# Altium PCB 175-00061, rev1, PCB, NRES Crate Slot MotherBoard.PcbDoc (part 1 of 2)
Units mm, origin at the board's own origin, x right, y up, seen from the top; angles counter-clockwise.
Board outline 222 x 100 mm, 6 copper layers (Top Layer (*.GTL), MidLayer1 (*G1), InternalPlane1 (*.GP1), InternalPlane2 (*.GP2), InternalPlane3 (*.GP3), Bottom Layer (*GBL)); 58 components, 62 nets, 611 pads, 118 vias.
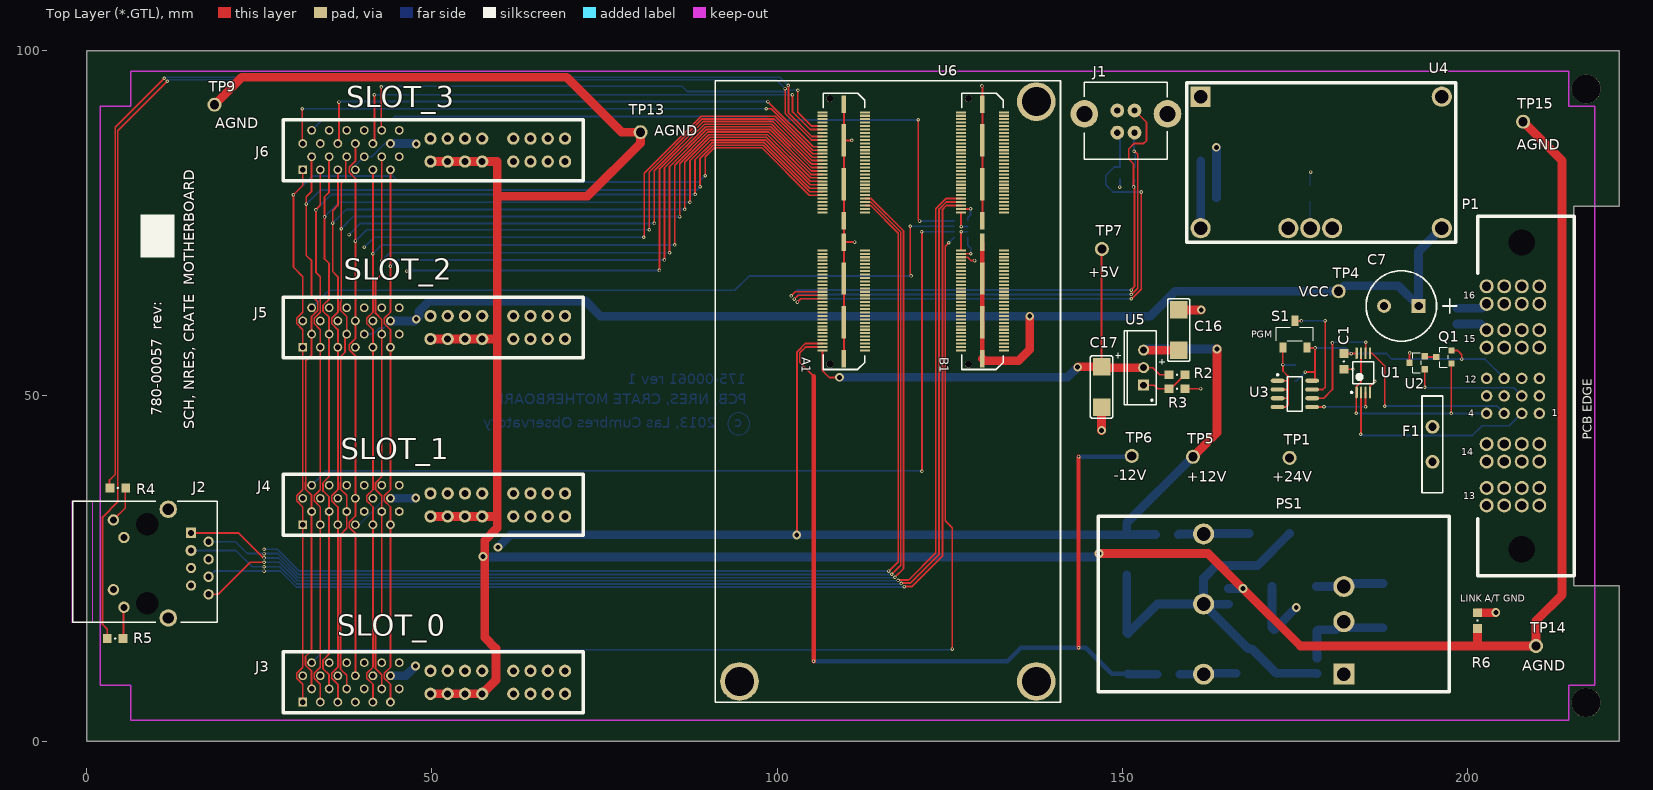
[diagram p0: Top Layer (*.GTL) view]
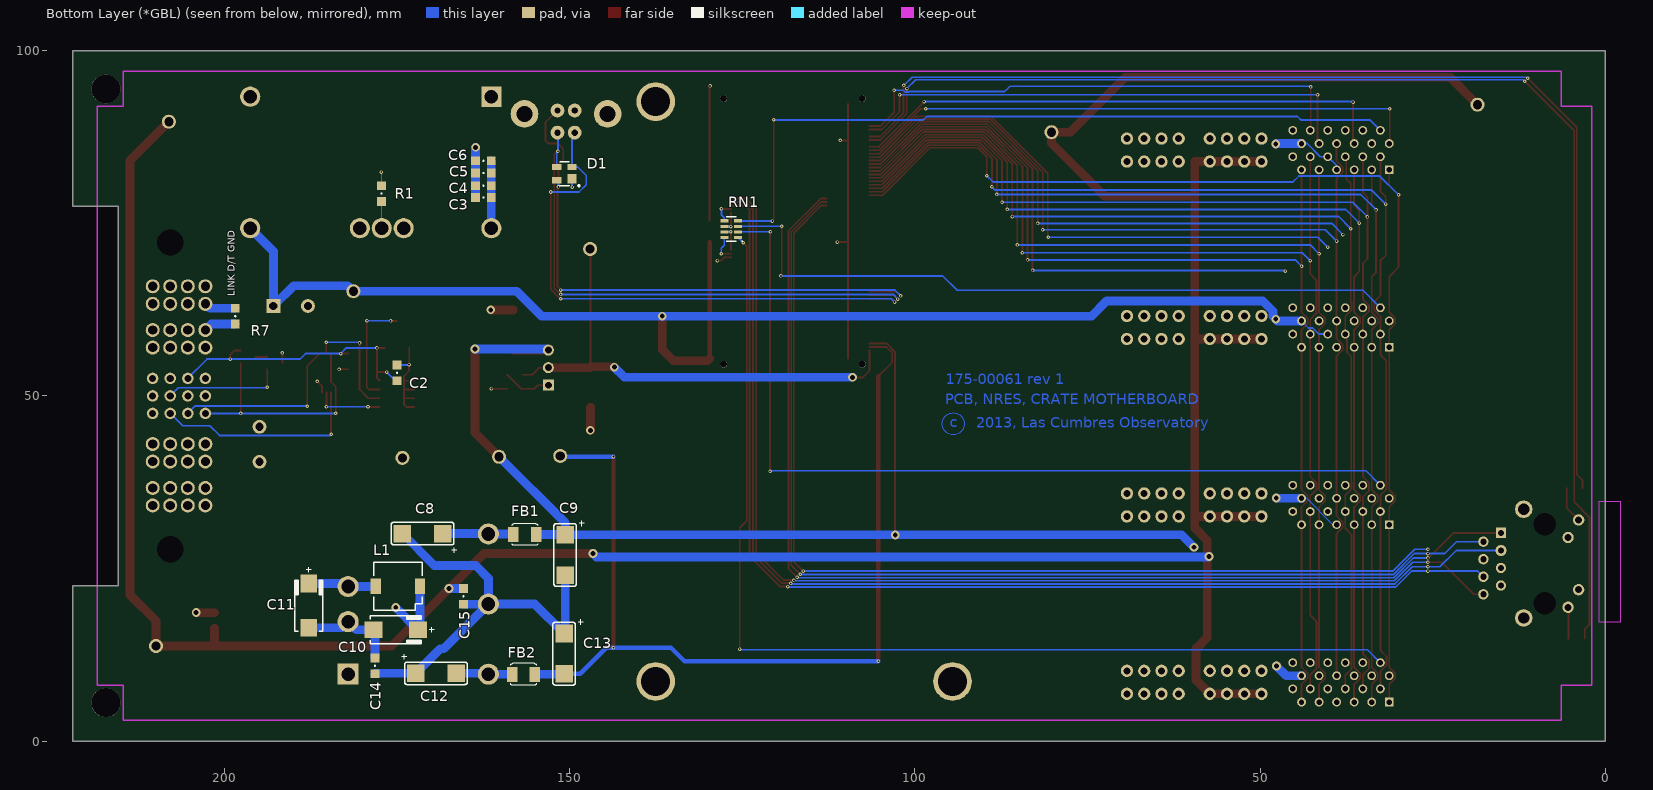
[diagram p1: Bottom Layer (*GBL) view, seen from below]
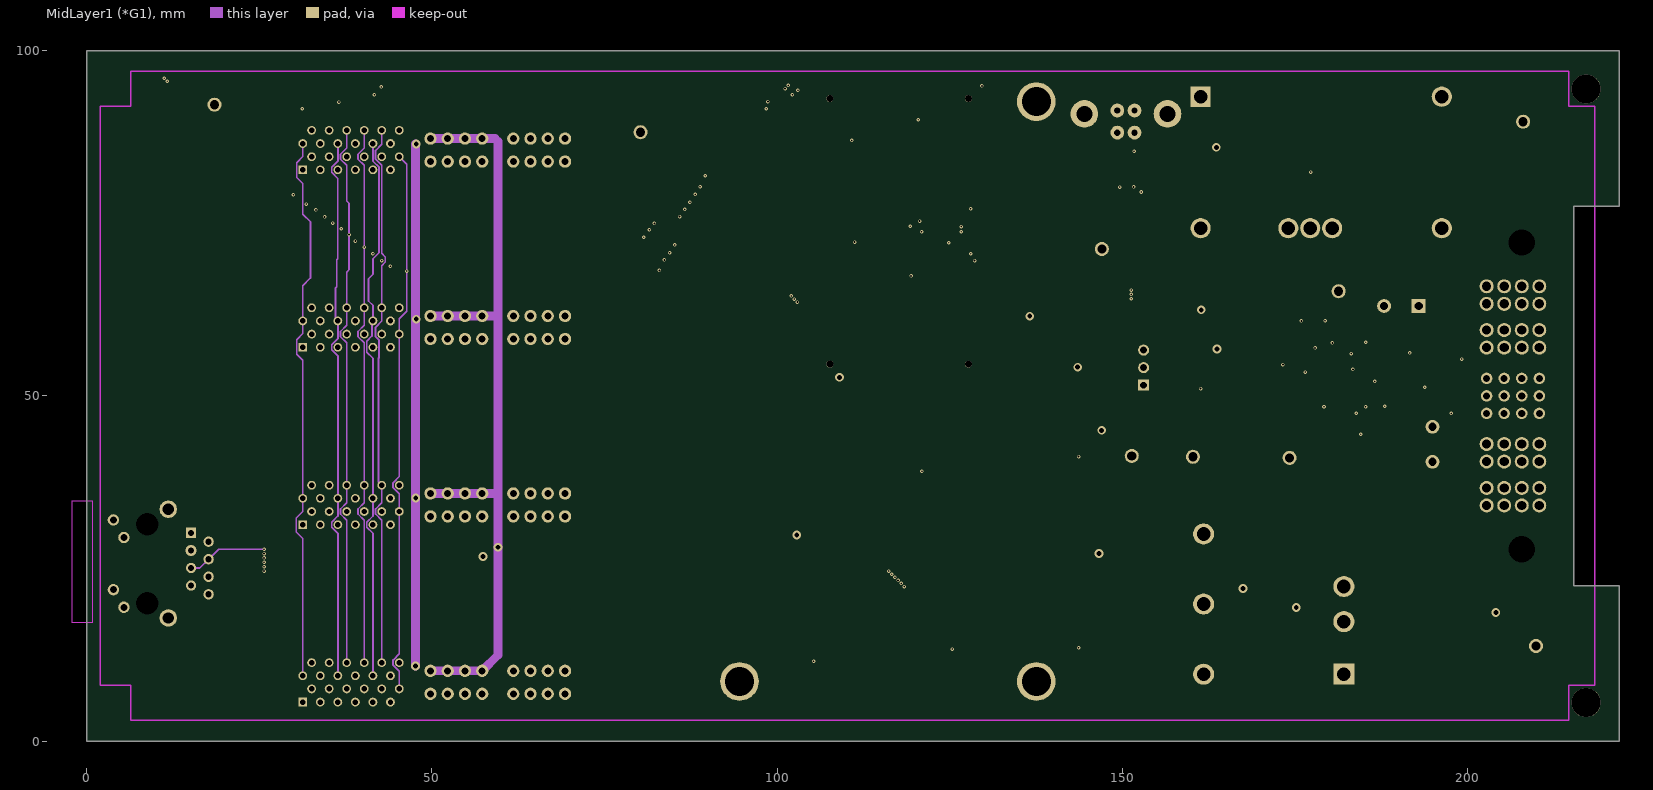
[diagram p2: MidLayer1 (*G1)]
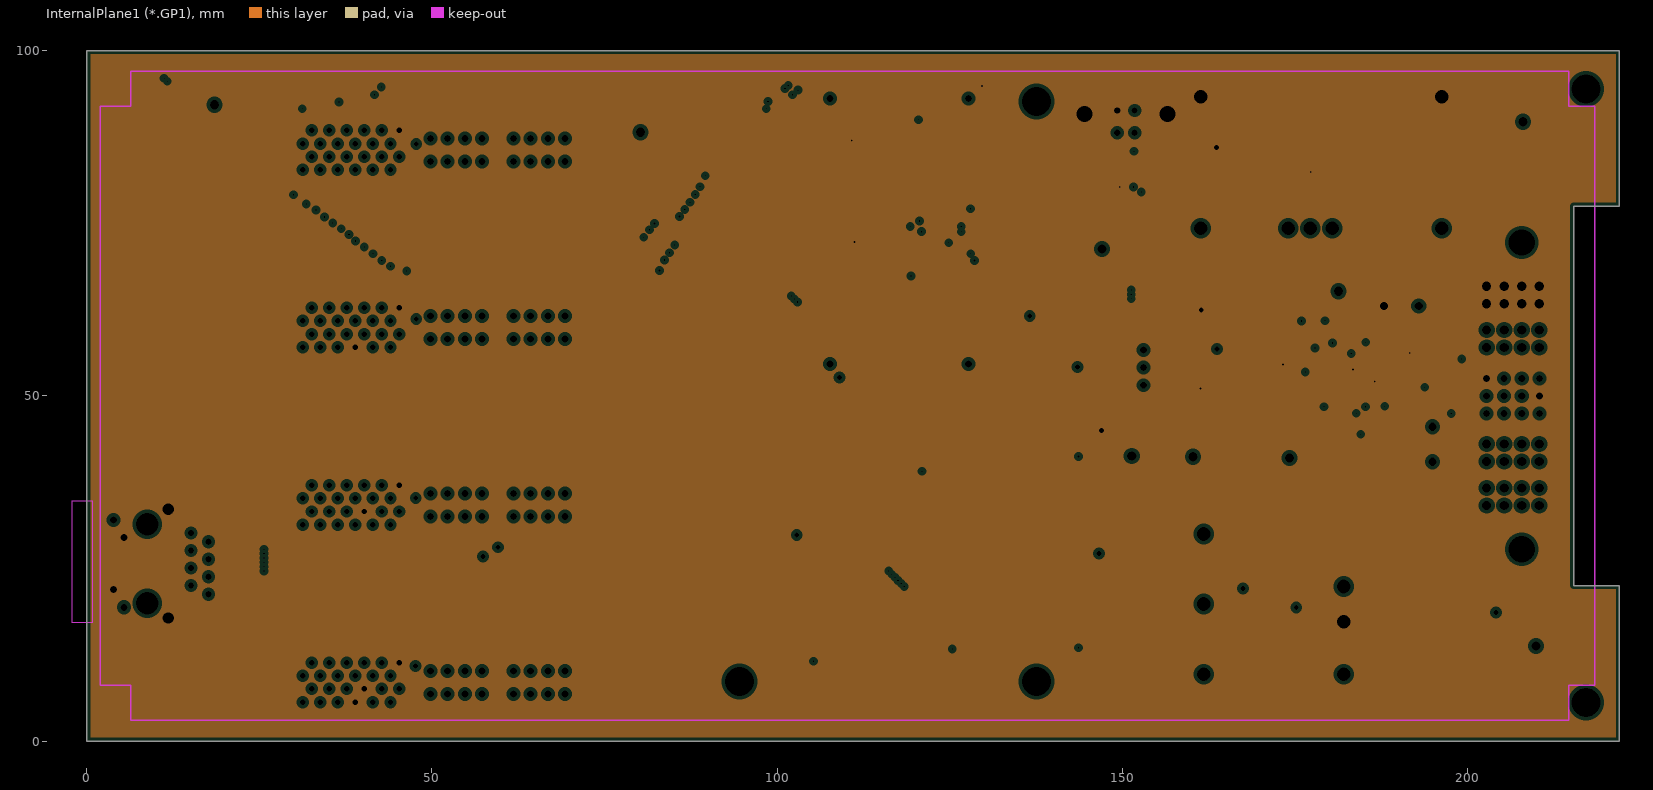
[diagram p3: InternalPlane1 (*.GP1), clearances drawn from the general rule]
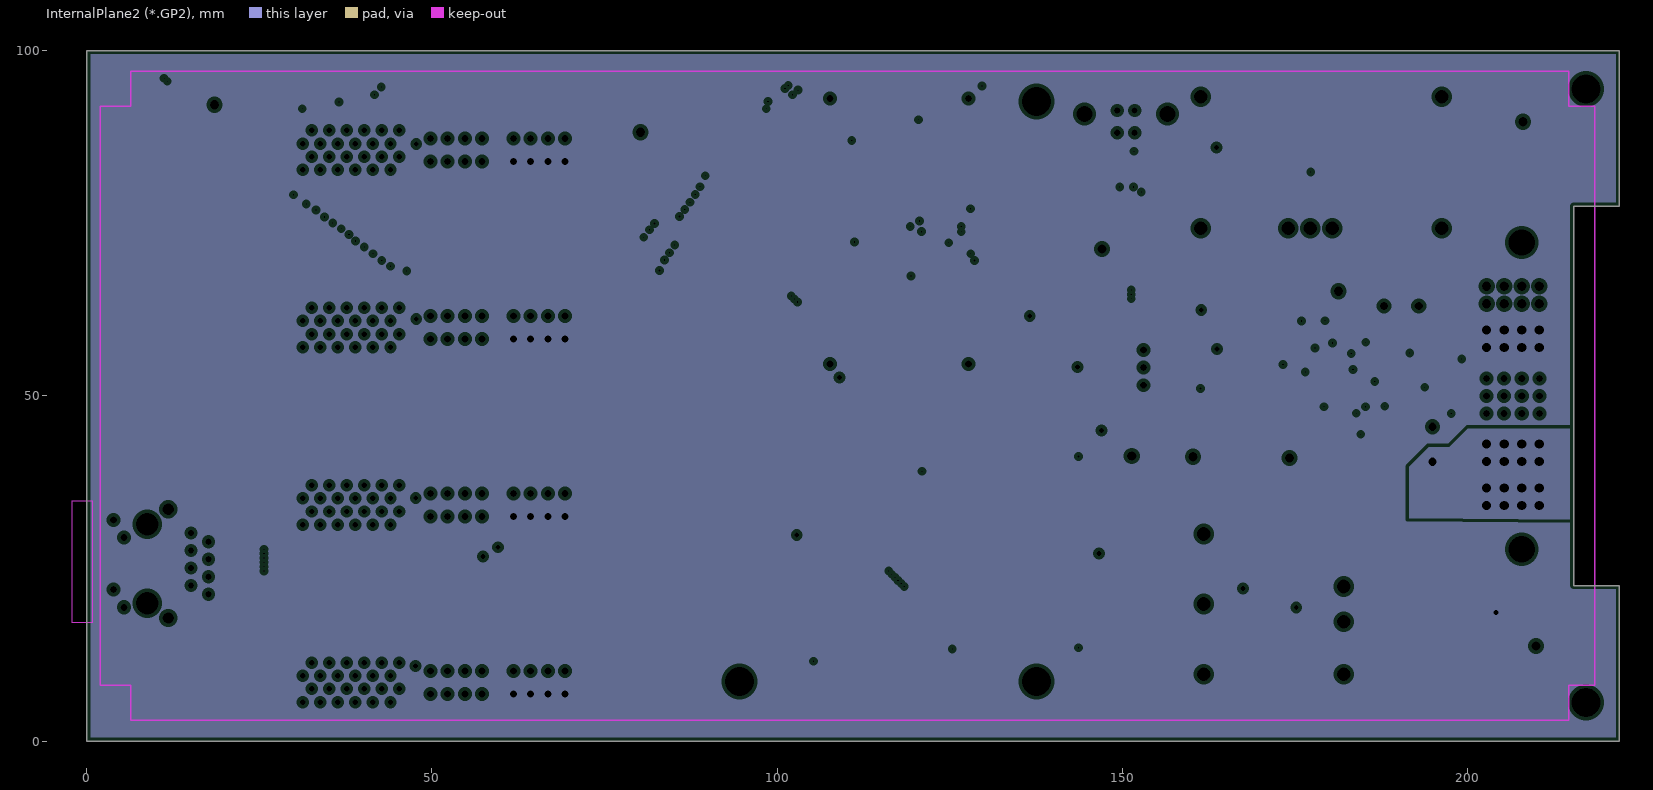
[diagram p4: InternalPlane2 (*.GP2), clearances drawn from the general rule]
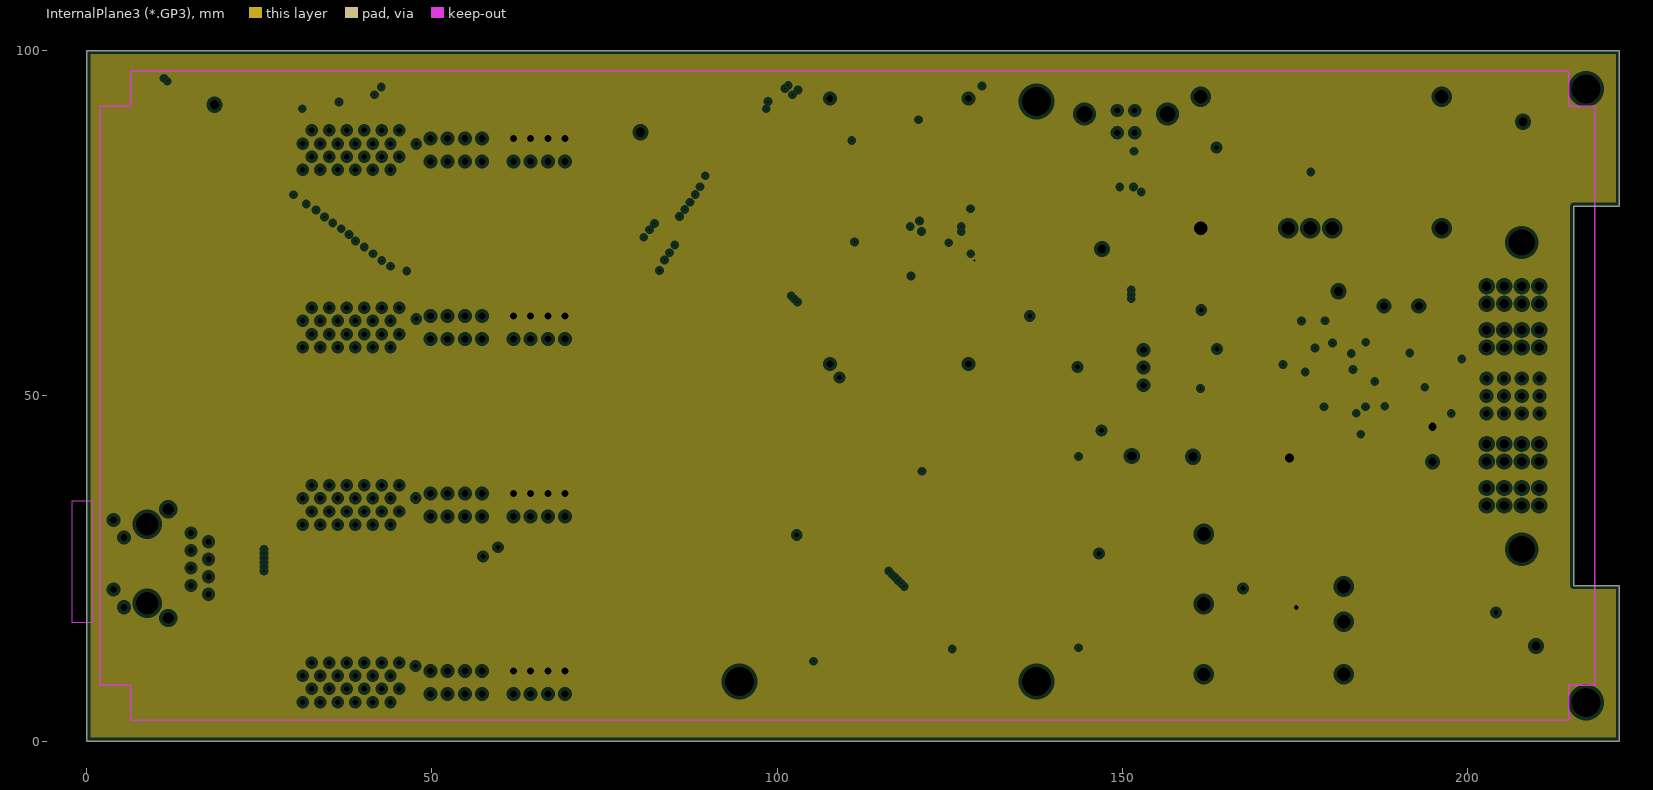
[diagram p5: InternalPlane3 (*.GP3), clearances drawn from the general rule]

## Layer stack, top to bottom
Top Layer (*.GTL): signal copper 0.0356
Dielectric: core 0.32, FR-4, Dk 4.8
MidLayer1 (*G1): signal copper 0.0356
Dielectric: prepreg 0.32, FR-4, Dk 4.8
InternalPlane1 (*.GP1): plane copper 0.0356, net D
Dielectric: core 0.32, FR-4, Dk 4.8
InternalPlane2 (*.GP2): plane copper 0.0356, net (Multiple Nets)
Dielectric: prepreg 0.32, FR-4, Dk 4.8
InternalPlane3 (*.GP3): plane copper 0.0356, net +24V
Dielectric: core 0.32, FR-4, Dk 4.8
Bottom Layer (*GBL): signal copper 0.0356

## Board outline
0,0 0,100 222,100 222,77.5 215.4,77.5 215.4,22.5 222,22.5 222,0

## Design rules (kind name [scope] priority, off if disabled: settings)
Clearance [All] p1: gap=0.127
HoleSize [All] p1: absolutevalues=TRUE maxlimit=7.62 minlimit=0.025 maxpercent=80.000 minpercent=20.000
MinimumSolderMaskSliver [All] p1: minsoldermaskwidth=0.051
PlaneClearance [All] p1: clearance=0.508
PlaneConnect [All] p1: planeconnectstyle=Relief reliefexpansion=0.508 reliefentries=4 reliefconductorwidth=0.254 reliefairgap=0.254
PolygonConnect [All] p1: connectstyle=Relief reliefconductorwidth=0.254 reliefentries=4 polygonreliefangle="90 Angle"
RoomDefinition "780-00057, rev1, Pg2, SCH, NRES, Crate Slot MotherBoard" [InComponentClass('780-00057, rev1, Pg2, SCH, NRES, Crate Slot MotherBoard')] p1: confinementstyle=ConfineIn formatcopy=TRUE lockcomponents=FALSE outline -2.461,3.547 162.639,3.547 162.639,96.13 -2.461,96.13
RoomDefinition "780-00057, rev1, Pg1, SCH, NRES, Crate Slot MotherBoard" [InComponentClass('780-00057, rev1, Pg1, SCH, NRES, Crate Slot MotherBoard')] p2: confinementstyle=ConfineIn formatcopy=TRUE lockcomponents=FALSE outline -41.59,-72.285 303.215,-72.285 303.215,125.073 -41.59,125.073
RoutingVias [All] p1: holewidth=0.254 width=0.508 viastyle="Through Hole" minholewidth=0.254 minwidth=0.508 maxholewidth=0.711 maxwidth=1.27
SilkToSilkClearance [All] p1: silktosilkclearance=0.051
SilkscreenOverComponentPads [All] p1: minsilkscreentomaskgap=0.051
SolderMaskExpansion [All] p1: expansion=0.102
Width [All] p1: maxlimit=1.27 minlimit=0.127 preferedwidth=0.254 minimp=50.000000 maximp=50.000000 favimp=50.000000
22 further rules are at their usual default settings.

## Classes and differential pairs
component class "780-00057, rev1, Pg2, SCH, NRES, Crate Slot MotherBoard": D1 J1 J2 J3 J4 J5 J6 R4 R5 RN1 U6
component class "780-00057, rev1, Pg1, SCH, NRES, Crate Slot MotherBoard": C1 C2 C3 C4 C5 C6 C7 C8 C9 C10 C11 C12 C13 C14 C15 C16 C17 F1 FB1 FB2 L1 P1 PS1 Q1 R1 R2 R3 R6 R7 S1 TP1 TP4 TP5 TP6 TP7 TP9 TP13 TP14 TP15 U1 U2 U3 U4 U5

## Components (designator, comment, footprint, x,y, rotation, side; value= is the part's Value field where it differs from the comment)
C1 "Cap SMD" SMD_0805 182.101,54.991 r270 top
C2 "Cap SMD" SMD_0805 175.006,53.34 r90 bottom
C3 "35V CER" SMD_0805 162.499,78.718 r180 bottom
C4 "35V CER" SMD_0805 162.499,80.446 r180 bottom
C5 "35V CER" SMD_0805 162.499,82.274 r180 bottom
C6 "35V CER" SMD_0805 162.499,84.052 r180 bottom
C7 "35V" "CAP, Thru Hole 10mm dia" 190.428,63.021 r0 top
C8 "35V" SMD_CAP_6032 171.312,30.052 r180 bottom
C9 "35V" SMD_CAP_6032 150.662,26.953 r90 bottom
C10 "35V" SMD_CAP_7343 175.199,16.133 r180 bottom
C11 "35V" SMD_CAP_7343 187.822,19.613 r90 bottom
C12 "35V" SMD_CAP_6032 169.382,9.808 r0 bottom
C13 "35V" SMD_CAP_6032 150.815,12.653 r90 bottom
C14 "50V" SMD_0805 178.221,10.9 r270 bottom
C15 "Cap SMD" SMD_0805 165.394,20.959 r270 bottom
C16 "35V" SMD_CAP_6032 158.181,59.525 r270 top
C17 "35V" SMD_CAP_6032 147.005,51.286 r90 top
D1 "SP0503BAHT" SOT-143 150.764,82.198 r90 bottom
Designator89 "Comment" "TARGET MECHANICAL 5" -27.838,-40.615 r180 top
Designator90 "Comment" "TARGET MECHANICAL 5" -29.515,125.095 r180 top
Designator91 "Comment" "TARGET MECHANICAL 5" 239.319,120.523 r180 top
F1 "RUEF400" "PolySwitch Radial 0.2" 194.934,42.981 r90 top
FB1 "Bead" SMD_1210_INDUCT 156.504,29.9 r180 bottom
FB2 "Bead" SMD_1210_INDUCT 156.707,9.656 r180 bottom
J1 "61729-0010BLF" "USB Vertical PCB" 144.511,90.846 r180 top
J2 "CONN RJ-45" "RJ-45 w/magnetics" 8.75,31.415 r90 top
J3 "Molex 46114 backplane connector, 24 signal, 4 pwr" "MOLEX 46114 SERIES" 50.285,8.5 r180 top
J4 "Molex 46114 backplane connector, 24 signal, 4 pwr" "MOLEX 46114 SERIES" 50.285,34.2 r180 top
J5 "Molex 46114 backplane connector, 24 signal, 4 pwr" "MOLEX 46114 SERIES" 50.285,59.9 r180 top
J6 "Molex 46114 backplane connector, 24 signal, 4 pwr" "MOLEX 46114 SERIES" 50.285,85.6 r180 top
L1 "445-3869-1-ND" "Inductor TDC SLF" 174.894,22.407 r270 bottom
P1 "PETC-02-12-02--01-S-RA-SD" PETC-02-12-02-01-RA 206.6,50 r0 top locked
PS1 "BetaDyne LMB15" "BetaDyne LNB15, DC/DC" 146.541,7.136 r0 top
Q1 "FDV304P" SMD_SOT23_3 196.596,55.626 r90 top
R1 "Res 0805" SMD_0805 177.256,79.303 r270 bottom
R2 "Res 0805" SMD_0805 157.927,53.064 r180 top
R3 "Res 0805" SMD_0805 157.927,51.032 r180 top
R4 "Res 0805" SMD_0805 4.485,36.665 r0 top
R5 "Res 0805" SMD_0805 4.104,14.836 r0 top
R6 "Res 0805" smd_0805 201.473,17.45 r90 top
R7 "Res 0805" smd_0805 198.45,61.544 r90 bottom
RN1 "RES ARRAY  x4 10K" "RES ARRAY 0603 x 4" 125.549,72.965 r90 bottom
S1 "CJS-1200TB" CAS-120B 175.006,58.947 r0 top
TP1 "Test point" PAD_80D_052H 174.244,41.021 r90 top
TP4 "Test point" PAD_80D_052H 181.345,65.155 r90 top
TP5 "Test point" PAD_80D_052H 160.238,41.177 r90 top
TP6 "Test point" PAD_80D_052H 151.373,41.304 r90 top
TP7 "Test point" PAD_80D_052H 147.041,71.272 r90 top
TP9 "Test point" PAD_80D_052H 18.491,92.177 r90 top
TP13 "Test point" PAD_80D_052H 80.213,88.189 r90 top
TP14 "Test point" PAD_80D_052H 209.931,13.767 r90 top
TP15 "Test point" PAD_80D_052H 208.077,89.713 r90 top
U1 "SN74CBT3306PWLE" PW008_N 184.912,53.34 r90 top
U2 "DS2411" SMD_SOT23_3 192.71,54.788 r90 top
U3 "M24C32RMN1" SOP8_N 175.006,50.292 r0 top
U4 "6A Pos Switching Regulator" "TEXAS Inst Switching Regulator" 161.356,74.286 r0 top
U5 "LM350T" TO-220AB 153.101,54.08 r90 top
U6 "SuperFin Module" "SuperFin Footprint" 94.551,92.628 r270 top locked

## Footprints (in the part's own frame and the unit in brackets; to place one, negate y for a bottom-side part, rotate by r counter-clockwise, add the part's x,y. Pads: shape width x height; smd on the part's side, far side on the other; paste and mask are expansions set on the pad)
"BetaDyne LNB15, DC/DC" [mil] "15W Low Noise"
  rect 120x120 hole 78: 1(1400,100)
  round 120 hole 78: 2(1400,400) 3(1400,600) 4(600,900) 5(600,500) 6(600,100)
  silkscreen extent 0,0 2000,1000
"CAP, Thru Hole 10mm dia" [mm]
  rect 2x2 hole 1.2: 1(2.5,0)
  round 2 hole 1.2: 2(-2.5,0)
  silkscreen extent -5.1,-5.1 8,5.1
CAS-120B [mm] "Copal Electronics CAS SMD Slide Switch"
  rect 1x1.5 smd: 1(-1.75,-1.95) 2(0,1.95) 3(1.75,-1.95)
  silkscreen extent -2.69,-1 2.69,1
"Inductor TDC SLF" [mm] "SLF series"
  rect 2.2x1.5 smd: 1(0,3.2) 2(0,-3.2)
  silkscreen extent -3.5,-3.5 3.5,3.5
"MOLEX 46114 SERIES" [mil] "VERT MOUNT PCB"
  rect 50x50 hole 31 paste-6 mask-3.5: 1(747.86,112.5)
  round 50 hole 31 paste-6 mask-3.5: 2(697.86,37.5) 3(647.86,112.5) 4(597.86,37.5) 5(547.86,112.5) 6(497.86,37.5) 7(447.86,112.5) 8(397.86,37.5) 9(347.86,112.5) 10(297.86,37.5) 11(247.86,112.5) 12(197.86,37.5) 13(747.86,-37.5) 14(697.86,-112.5) 15(647.86,-37.5) 16(597.86,-112.5) 17(547.86,-37.5) 18(497.86,-112.5) 19(447.86,-37.5) 20(397.86,-112.5) 21(347.86,-37.5) 22(297.86,-112.5) 23(247.86,-37.5) 24(197.86,-112.5)
  round 70 hole 40 paste-6 mask-3.5: P1(-275.42,65.5) P1(-176.99,65.5) P1(-78.57,65.5) P1(19.86,65.5) P2(-747.86,65.5) P2(-649.43,65.5) P2(-551.01,65.5) P2(-452.58,65.5) P3(-275.42,-65.6) P3(-176.99,-65.6) P3(-78.57,-65.6) P3(19.86,-65.6) P4(-747.86,-65.6) P4(-649.43,-65.6) P4(-551.01,-65.6) P4(-452.58,-65.6)
  silkscreen extent -851,-174 860,173
PAD_80D_052H [mil]
  round 80 hole 52: 1(0,0)
PETC-02-12-02-01-RA [mil] "Samtec Male Pins, PWR(4), Signal(12), Right Angle"
  round 59.06 hole 150 unplated: 0(50,-875) 0(50,875)
  round 65 hole 40: 1(150,-100) 2(50,-100) 3(-50,-100) 4(-150,-100) 5(150,0) 6(50,0) 7(-50,0) 8(-150,0) 9(150,100) 10(50,100) 11(-50,100) 12(-150,100)
  round 80 hole 52: 13(-150,-625) 13(-150,-525) 13(-50,-625) 13(-50,-525) 13(50,-625) 13(50,-525) 13(150,-625) 13(150,-525) 14(-150,-375) 14(-150,-275) 14(-50,-375) 14(-50,-275) 14(50,-375) 14(50,-275) 14(150,-375) 14(150,-275) 15(-150,275) 15(-150,375) 15(-50,275) 15(-50,375) 15(50,275) 15(50,375) 15(150,275) 15(150,375) 16(-150,525) 16(-150,625) 16(-50,525) 16(-50,625) 16(50,525) 16(50,625) 16(150,525) 16(150,625)
  silkscreen extent -200,-1025 350,1025
"PolySwitch Radial 0.2" [mm] "PolySwitch footprint"
  round 2 hole 1.2: 1(-2.54,0) 2(2.54,0)
  silkscreen extent -7,-1.5 7,1.5
PW008_N [mm] "SOP, 8-Leads, Body 3x4.4mm, Pitch 0.65mm, IPC Medium Density"
  oval 1.7x0.35 smd: 1(-2.85,0.975) 2(-2.85,0.325) 3(-2.85,-0.325) 4(-2.85,-0.975) 5(2.85,-0.975) 6(2.85,-0.325) 7(2.85,0.325) 8(2.85,0.975)
  silkscreen extent -2.97,-1.55 1.6,1.82, body extent -2.25,-1.55 2.25,1.55, height 3.1
"RES ARRAY 0603 x 4" [mm]
  rect 0.44x1.15 smd: 1(0,0.1) 2(0,2.05) 3(0.8,0.1) 4(0.8,2.05) 5(1.6,0.1) 6(1.6,2.05) 7(2.4,0.1) 8(2.4,2.05)
  silkscreen extent -0.6,-0.6 3,1.8
"RJ-45 w/magnetics" [mm] "Conn, Pulse Eng p/n J0011D01BNL"
  rect 1.5x1.5 hole 0.9: 1(-1.27,-6.35)
  round 1.5 hole 0.9: 2(-2.54,-8.89) 4(-5.08,-8.89) 5(-6.35,-6.35) 6(-7.62,-8.89) 7(-8.89,-6.35) 8(-10.16,-8.89)
  round 1.6 hole 0.9: 3(-3.81,-6.35)
  round 1.651 hole 1.016: 9(0.61,4.902) 10(-1.93,3.378) 11(-9.5,4.902) 12(-12.04,3.378)
  round 2.54 hole 1.6: 13(2.159,-3.048) 14(-13.589,-3.048)
  round 2.95 hole 3.25 unplated: MH1(0,0) MH2(-11.43,0)
  Keep-Out Layer region: -14.228,7.874 3.298,7.874 3.298,10.922 -14.228,10.922
  silkscreen extent -14.22,-10.16 3.3,10.79
SMD_0805 [mil]
  rect 50x50 smd: 1(-45,0) 2(45,0)
  silkscreen extent -1,-1 1,1
smd_0805 [mil]
  rect 50x50 smd: 1(-45,0) 2(45,0)
  silkscreen extent -1,-1 1,1
SMD_1210_INDUCT [mil]
  rect 60x86 smd: 1(-65,0) 2(65,0)
  silkscreen extent -73,-62 73,62
SMD_CAP_6032 [mil]
  rect 100x100 smd: NEG(-115,0) POS(115,0)
  silkscreen extent -179,-110 195,64
SMD_CAP_7343 [mil]
  rect 102x94 smd: NEG(-126,0) POS(126,0)
  silkscreen extent -145,-80 220,80
SMD_SOT23_3 [mil]
  rect 36x36 smd: 1(-37,-43) 2(37,-43) 3(0,43)
  silkscreen extent -57,-25 57,25
SOP8_N [mm] "SOIC, 8-Leads, Body 4.9x3.9mm, Pitch 1.27mm, IPC Medium Density"
  oval 2x0.6 smd: 1(-2.5,1.905) 2(-2.5,0.635) 3(-2.5,-0.635) 4(-2.5,-1.905) 5(2.5,-1.905) 6(2.5,-0.635) 7(2.5,0.635) 8(2.5,1.905)
  silkscreen extent -2.62,-2.5 1.1,2.88, body extent -2,-2.5 2,2.5, height 1.75
SOT-143 [mm] "SOT-143; 4 Leads; Body 3 x 2.6 mm, inc. leads (LxW max)"
  rect 1.35x1.35 smd: 1(-0.75,-1.1)
  rect 0.9x1.35 smd: 2(0.95,-1.1) 3(0.95,1.1) 4(-0.95,1.1)
  silkscreen extent -1.87,-2.22 1.75,0.7
"SuperFin Footprint" [mm] "SAMTEC QTH-060-01-L-D-A (x2)"
  round 5.6 hole 4.22: 0(0,43) 0(84,43) 0(84,0)
  round 1 hole 1.02 unplated: 0(38.04,33.15) 0(38.04,13.08) 1(-0.44,33.15) 1(-0.44,13.08)
  rect 0.3x1.45 smd paste+0 mask+0.05: A1(36.05,12.03) A2(36.05,18.21) A3(35.55,12.03) A4(35.55,18.21) A5(35.05,12.03) A6(35.05,18.21) A7(34.55,12.03) A8(34.55,18.21) A9(34.05,12.03) A10(34.05,18.21) A11(33.55,12.03) A12(33.55,18.21) A13(33.05,12.03) A14(33.05,18.21) A15(32.55,12.03) A16(32.55,18.21) A17(32.05,12.03) A18(32.05,18.21) A19(31.55,12.03) A20(31.55,18.21) A21(31.05,12.03) A22(31.05,18.21) A23(30.55,12.03) A24(30.55,18.21) A25(30.05,12.03) A26(30.05,18.21) A27(29.55,12.03) A28(29.55,18.21) A29(29.05,12.03) A30(29.05,18.21) A31(28.55,12.03) A32(28.55,18.21) A33(28.05,12.03) A34(28.05,18.21) A35(27.55,12.03) A36(27.55,18.21) A37(27.05,12.03) A38(27.05,18.21) A39(26.55,12.03) A40(26.55,18.21) A41(26.05,12.03) A42(26.05,18.21) A43(25.55,12.03) A44(25.55,18.21) A45(25.05,12.03) A46(25.05,18.21) A47(24.55,12.03) A48(24.55,18.21) A49(24.05,12.03) A50(24.05,18.21) A51(23.55,12.03) A52(23.55,18.21) A53(23.05,12.03) A54(23.05,18.21) A55(22.55,12.03) A56(22.55,18.21) A57(22.05,12.03) A58(22.05,18.21) A59(21.55,12.03) A60(21.55,18.21) A61(16.05,12.03) A62(16.05,18.21) A63(15.55,12.03) A64(15.55,18.21) A65(15.05,12.03) A66(15.05,18.21) A67(14.55,12.03) A68(14.55,18.21) A69(14.05,12.03) A70(14.05,18.21) A71(13.55,12.03) A72(13.55,18.21) A73(13.05,12.03) A74(13.05,18.21) A75(12.55,12.03) A76(12.55,18.21) A77(12.05,12.03) A78(12.05,18.21) A79(11.55,12.03) A80(11.55,18.21) A81(11.05,12.03) A82(11.05,18.21) A83(10.55,12.03) A84(10.55,18.21) A85(10.05,12.03) A86(10.05,18.21) A87(9.55,12.03) A88(9.55,18.21) A89(9.05,12.03) A90(9.05,18.21) A91(8.55,12.03) A92(8.55,18.21) A93(8.05,12.03) A94(8.05,18.21) A95(7.55,12.03) A96(7.55,18.21) A97(7.05,12.03) A98(7.05,18.21) A99(6.55,12.03) A100(6.55,18.21) A101(6.05,12.03) A102(6.05,18.21) A103(5.55,12.03) A104(5.55,18.21) A105(5.05,12.03) A106(5.05,18.21) A107(4.55,12.03) A108(4.55,18.21) A109(4.05,12.03) A110(4.05,18.21) A111(3.55,12.03) A112(3.55,18.21) A113(3.05,12.03) A114(3.05,18.21) A115(2.55,12.03) A116(2.55,18.21) A117(2.05,12.03) A118(2.05,18.21) A119(1.55,12.03) A120(1.55,18.21) B1(36.05,32.1) B2(36.05,38.28) B3(35.55,32.1) B4(35.55,38.28) B5(35.05,32.1) B6(35.05,38.28) B7(34.55,32.1) B8(34.55,38.28) B9(34.05,32.1) B10(34.05,38.28) B11(33.55,32.1) B12(33.55,38.28) B13(33.05,32.1) B14(33.05,38.28) B15(32.55,32.1) B16(32.55,38.28) B17(32.05,32.1) B18(32.05,38.28) B19(31.55,32.1) B20(31.55,38.28) B21(31.05,32.1) B22(31.05,38.28) B23(30.55,32.1) B24(30.55,38.28) B25(30.05,32.1) B26(30.05,38.28) B27(29.55,32.1) B28(29.55,38.28) B29(29.05,32.1) B30(29.05,38.28) B31(28.55,32.1) B32(28.55,38.28) B33(28.05,32.1) B34(28.05,38.28) B35(27.55,32.1) B36(27.55,38.28) B37(27.05,32.1) B38(27.05,38.28) B39(26.55,32.1) B40(26.55,38.28) B41(26.05,32.1) B42(26.05,38.28) B43(25.55,32.1) B44(25.55,38.28) B45(25.05,32.1) B46(25.05,38.28) B47(24.55,32.1) B48(24.55,38.28) B49(24.05,32.1) B50(24.05,38.28) B51(23.55,32.1) B52(23.55,38.28) B53(23.05,32.1) B54(23.05,38.28) B55(22.55,32.1) B56(22.55,38.28) B57(22.05,32.1) B58(22.05,38.28) B59(21.55,32.1) B60(21.55,38.28) B61(16.05,32.1) B62(16.05,38.28) B63(15.55,32.1) B64(15.55,38.28) B65(15.05,32.1) B66(15.05,38.28) B67(14.55,32.1) B68(14.55,38.28) B69(14.05,32.1) B70(14.05,38.28) B71(13.55,32.1) B72(13.55,38.28) B73(13.05,32.1) B74(13.05,38.28) B75(12.55,32.1) B76(12.55,38.28) B77(12.05,32.1) B78(12.05,38.28) B79(11.55,32.1) B80(11.55,38.28) B81(11.05,32.1) B82(11.05,38.28) B83(10.55,32.1) B84(10.55,38.28) B85(10.05,32.1) B86(10.05,38.28) B87(9.55,32.1) B88(9.55,38.28) B89(9.05,32.1) B90(9.05,38.28) B91(8.55,32.1) B92(8.55,38.28) B93(8.05,32.1) B94(8.05,38.28) B95(7.55,32.1) B96(7.55,38.28) B97(7.05,32.1) B98(7.05,38.28) B99(6.55,32.1) B100(6.55,38.28) B101(6.05,32.1) B102(6.05,38.28) B103(5.55,32.1) B104(5.55,38.28) B105(5.05,32.1) B106(5.05,38.28) B107(4.55,32.1) B108(4.55,38.28) B109(4.05,32.1) B110(4.05,38.28) B111(3.55,32.1) B112(3.55,38.28) B113(3.05,32.1) B114(3.05,38.28) B115(2.55,32.1) B116(2.55,38.28) B117(2.05,32.1) B118(2.05,38.28) B119(1.55,32.1) B120(1.55,38.28)
  rect 2.54x0.64 smd: A121(20.355,15.12) A121(37.245,15.12) A122(0.355,15.12) A122(17.245,15.12) B121(20.355,35.19) B121(37.245,35.19) B122(0.355,35.19) B122(17.245,35.19)
  rect 4.7x0.64 smd: A121(25.625,15.12) A121(31.975,15.12) A122(5.625,15.12) A122(11.975,15.12) B121(25.625,35.19) B121(31.975,35.19) B122(5.625,35.19) B122(11.975,35.19)
  silkscreen extent -3,-3.5 87,46.5
"TARGET MECHANICAL 5" [mm]
"TEXAS Inst Switching Regulator" [mil] "Texas Instruments Integrated switching regulator"
  rect 115x115 hole 78: 1(0,750)
  round 115 hole 78: 2(0,0) 3(500,0) 4(625,0) 5(750,0) 6(1375,0) 7(1375,750)
  silkscreen extent -80,-80 1455,830
TO-220AB [mm] "TO, Thru-Hole, Vertical, Heatsink Mounted; 3 In-Line Leads; Pitch 2.54 mm"
  rect 1.6x1.6 hole 1: 1(-2.54,0)
  round 1.6 hole 1: 2(0,0) 3(2.54,0)
  silkscreen extent -5.35,-1.85 5.35,2.85, body extent -5.4,-1.9 5.4,2.9, height 19.3
"USB Vertical PCB" [mm] "EDAC USB typeB p/n 690-004-260-023"
  round 2 hole 0.92: 1(-4.77,2.71) 2(-7.27,2.71) 3(-7.27,-0.49) 4(-4.77,-0.49)
  round 4 hole 2.3: 5(-12.04,0) 6(0,0)
  silkscreen extent -12,-4.6 0,6.6

## Part data
C1 C2 C15: "Capacitor"
C3 C4 C5 C6 C14: library part "Cap SMD", "Capacitor"
C7: library part "Cap Elec, 330 uF, 35V", "Radial Thru hole"
C8 C9 C10 C11 C12 C13 C16 C17: library part "Cap Tant 35V", "outline 6.0mm x 3.2mm"
D1: library part 3-Zener
F1: library part "Fuse Thermal", "PolySwitch RUE Series"
FB1 FB2: library part "Ferrite Bead SMD 1210", "Ferrite Bead  SMD 1210"
J1: library part "Header 6", "Header, 6-Pin"
J2: library part "CONN RJ-45 with Magnetics", "Right Angle, Standard Profile, RJ45-Keyed, Flange Mount PCB Jack"
L1: library part "Inductor SMD 10uH 1.8A", "Inductor"
P1: "SAMTEC, SIGNAL(12)+PWR(4)"
PS1: "DC/DC LMB15 15W, Dual Output"
Q1: "P-MOSFET LOGIC LEVEL"
R1 R2 R3 R4 R5 R6 R7: library part "Res SMD", "Resistor 0805"
RN1: "Resistor Array 4 Isolated"
S1: library part SW_SPDT_DOUG
TP1 TP4 TP5 TP6 TP7 TP9 TP13 TP14 TP15: "Test Point"
U1: "Dual FET Bus Switch"
U2: "Silicon Serial Number"
U3: "32 Kbit Serial I²C Bus EEPROM"
U4: library part PTN78020W, "Pos Adj Switching Regulator"
U5: "3-Amp Adjustable Regulator"

## Free pads (board coordinates)
  round 4.22 hole 4.22 unplated: ""(217.195,5.563) ""(217.195,94.463)

## Via types
v1: diameter 0.508, hole 0.254, Top Layer (*.GTL) to Bottom Layer (*GBL), tented both sides, 100 vias
v2: diameter 1.27, hole 0.711, Top Layer (*.GTL) to Bottom Layer (*GBL), 18 vias

## Nets (pads, with @x,y where several pads share a name; then routed paths per layer and width w, separated by ;. In a path a pad name is that pad's centre, name@x,y a point inside that pad or via, vN(x,y) a via of type N, cw(c..) or ccw(c..) an arc to the next point about the centre after c; other vN are vias at no path point)
+3.3V_BKPL: C1.1 C2.1 P1.11 Q1.2 S1.3 U1.8 U3.8 | length 42.9
  Top Layer (*.GTL) w0.254: v1(176.505,53.442) 177.902,53.442 177.927,53.467 ; S1.3@176.807,56.947 v1(177.927,56.947) 177.927,53.467 ; U3.8@177.506,52.197 177.927,52.618 177.927,53.467 ; C1.1@182.101,56.134 v1(183.159,56.134) U1.8@183.881,56.134 ; Q1.2@197.688,56.566 198.603,56.566 199.187,55.982 v1(199.187,55.321)
  Bottom Layer (*GBL) w0.254: C2.1@175.006,52.197 175.26,52.197 v1(176.505,53.442) ; v1(177.927,56.947) 182.347,56.947 v1(183.159,56.134) 188.265,56.134 189.078,55.321 v1(199.187,55.321) 202.549,55.321 P1.11@205.33,52.54
+5V: C17.POS R2.2 TP7.1 U5.2 U6.A1 | length 71.7
  Top Layer (*.GTL) w0.254: U6.A1@106.581,56.578 106.581,53.643 107.569,52.654 109.017,52.654 v2(109.042,52.68) ; C17.POS@147.005,54.207 147.005,71.236 TP7.1@147.041,71.272 ; U5.2@153.101,54.08 154.428,54.08 155.444,53.064 R2.2@156.784,53.064
  Top Layer (*.GTL) w1.27: v2(143.535,54.153) 143.59,54.207 C17.POS@147.005,54.207 147.132,54.08 U5.2@153.101,54.08
  Bottom Layer (*GBL) w1.27: v2(109.042,52.68) 142.062,52.68 v2(143.535,54.153)
+12V: C9.POS C16.POS FB1.2 J3.P3 J4.P3 J5.P3 J6.P3 TP5.1 U5.3 U6.A5 | length 289.6
  Top Layer (*.GTL) w0.254: v2(102.845,29.845) 102.895,29.896 102.895,56.388 104.086,57.578 U6.A5@106.581,57.578
  Top Layer (*.GTL) w1.27: U5.3@153.101,56.62 158.164,56.62 C16.POS@158.181,56.604 ; TP5.1@160.238,41.177 163.728,44.668 v2(163.728,56.769)
  MidLayer1 (*G1) w1.27: J3.P3@49.781,10.166 J3.P3@52.281,10.166 J3.P3@54.781,10.166 J3.P3@57.281,10.166 59.563,12.449 v2(59.563,28.067) 59.563,36.119 ; J4.P3@49.781,35.866 J4.P3@52.281,35.866 J4.P3@54.781,35.866 J4.P3@57.281,35.866 59.311,35.866 59.563,36.119 ; J5.P3@49.781,61.566 J5.P3@52.281,61.566 J5.P3@54.781,61.566 J5.P3@57.281,61.566 59.541,61.566 59.563,61.544 ; J6.P3@49.781,87.266 J6.P3@52.281,87.266 J6.P3@54.781,87.266 J6.P3@57.281,87.266 59.139,87.266 59.563,86.843 59.563,61.544 ; 59.563,36.119 59.563,61.544
  Bottom Layer (*GBL) w1.27: v2(59.563,28.067) 61.37,29.874 C9.POS@150.662,29.874 ; U5.3@153.101,56.62 153.249,56.769 v2(163.728,56.769) ; FB1.2@154.853,29.9 150.688,29.9 C9.POS@150.662,29.874 ; TP5.1@160.238,41.177 150.662,31.601 C9.POS@150.662,29.874
+24V: C3.2 C4.2 C5.2 C6.2 C10.POS F1.2 J3.P4 J4.P4 J5.P4 J6.P4 L1.1 TP1.1 U4.2 U6.B55 | length 22.8
  Top Layer (*.GTL) w0.254: U6.B55@126.651,70.078 127.614,70.078 128.092,69.6 v1(128.6,69.6)
  Bottom Layer (*GBL) w1.27: U4.2@161.356,74.286 C3.2@161.356,78.718 C4.2@161.356,80.446 C5.2@161.356,82.274 C6.2@161.356,84.052 ; L1.1@171.694,22.407 171.694,16.437 C10.POS@171.998,16.133 v2(175.199,19.333)
-12V: C13.NEG FB2.2 TP6.1 U6.A3 | length 136.8
  Top Layer (*.GTL) w0.254: 105.283,52.832 103.276,54.839 103.276,56.23 104.125,57.078 U6.A3@106.581,57.078
  Top Layer (*.GTL) w0.635: v1(105.283,11.557) 105.283,52.832 ; v1(143.662,13.513) v1(143.662,41.199)
  Bottom Layer (*GBL) w0.635: v1(105.283,11.557) 133.375,11.557 135.331,13.513 v1(143.662,13.513) 144.697,13.513 148.478,9.732 C13.NEG@150.815,9.732 ; v1(143.662,41.199) 151.268,41.199 TP6.1@151.373,41.304
  Bottom Layer (*GBL) w1.27: C13.NEG@150.815,9.732 150.891,9.656 FB2.2@155.056,9.656
A: C15.1 J3.P1 J4.P1 J5.P1 J6.P1 R6.1 TP9.1 TP13.1 TP14.1 TP15.1 | length 450.9
  Top Layer (*.GTL) w1.27: TP9.1@18.491,92.177 22.454,96.139 69.52,96.139 77.47,88.189 TP13.1@80.213,88.189 80.213,86.614 72.517,78.918 59.449,78.918 ; J3.P1@49.781,6.836 J3.P1@52.281,6.836 J3.P1@54.781,6.836 J3.P1@57.281,6.836 59.258,8.814 59.258,13.386 57.633,15.011 57.633,29.058 59.449,30.874 59.449,32.614 ; J4.P1@49.781,32.536 J4.P1@52.281,32.536 J4.P1@54.781,32.536 J4.P1@57.281,32.536 59.371,32.536 59.449,32.614 ; J5.P1@49.781,58.236 J5.P1@52.281,58.236 J5.P1@54.781,58.236 J5.P1@57.281,58.236 59.378,58.236 59.449,58.166 ; J6.P1@49.781,83.936 J6.P1@52.281,83.936 J6.P1@54.781,83.936 J6.P1@57.281,83.936 59.449,83.936 59.449,78.918 ; v2(146.634,27.178) 162.401,27.178 v2(167.477,22.102) 175.812,13.767 201.498,13.767 ; R6.1@201.473,16.307 201.473,13.792 201.498,13.767 ; TP15.1@208.077,89.713 213.716,84.074 213.716,21.184 209.931,17.399 TP14.1@209.931,13.767 201.498,13.767 ; 59.449,32.614 59.449,58.166 ; 59.449,58.166 59.449,78.918
  Bottom Layer (*GBL) w1.27: v2(57.404,26.721) 57.455,26.67 146.126,26.67 v2(146.634,27.178) ; C15.1@165.394,22.102 v2(167.477,22.102)
A0: J3.1 J4.1 J5.1 J6.1 U6.A71 | length 165.1
  Top Layer (*.GTL) w0.254: J3.1@31.289,5.643 31.289,8.195 30.4,9.084 30.4,9.821 31.289,10.71 J4.1@31.289,31.343 31.289,33.895 30.4,34.784 30.4,35.521 31.289,36.41 J5.1@31.289,57.042 31.289,59.595 30.4,60.484 30.4,61.221 31.289,62.11 31.289,67.268 29.936,68.621 v1(29.936,79.125) 31.289,80.478 J6.1@31.289,82.742 ; v1@89.575,81.868 89.575,84.611 90.896,85.932 97.816,85.932 104.67,79.078 U6.A71@106.581,79.078
  Bottom Layer (*GBL) w0.254: v1(29.936,79.125) 32.705,81.893 32.744,81.853 44.358,81.853 45.236,80.975 88.657,80.975 v1(89.575,81.893)
A1: J3.2 J4.2 J5.2 J6.2 U6.A73 | length 163.5
  Top Layer (*.GTL) w0.254: J3.2@32.559,7.548 32.559,10.1 31.67,10.989 31.67,12.247 32.559,13.136 J4.2@32.559,33.248 32.559,35.604 31.67,36.493 31.67,37.469 31.714,37.513 31.714,55.082 32.559,55.927 J5.2@32.559,58.947 32.559,61.5 33.448,62.389 33.448,63.646 32.559,64.535 32.559,69.564 31.79,70.333 v1(31.79,77.779) 31.79,78.85 32.559,79.619 J6.2@32.559,84.647 ; v1(88.839,80.293) 88.839,84.413 90.738,86.313 97.974,86.313 104.708,79.578 U6.A73@106.581,79.578
  Bottom Layer (*GBL) w0.254: v1(31.79,77.779) 33.818,79.807 88.352,79.807 v1(88.839,80.293)
A2: J3.3 J4.3 J5.3 J6.3 U6.A75 | length 163
  Top Layer (*.GTL) w0.254: J3.3@33.829,5.643 33.829,8.195 32.94,9.084 32.94,9.821 33.829,10.71 J4.3@33.829,31.343 33.829,33.895 32.94,34.784 32.94,35.521 33.829,36.41 J5.3@33.829,57.042 33.829,59.595 32.94,60.484 32.94,61.221 33.829,62.11 33.829,67.268 33.187,67.91 v1(33.187,76.942) 33.829,77.584 J6.3@33.829,82.742 ; v1@88.102,79.176 88.102,84.216 90.58,86.694 98.132,86.694 104.747,80.078 U6.A75@106.581,80.078
  Bottom Layer (*GBL) w0.254: v1(33.187,76.942) 35.421,79.176 v1(88.127,79.176)
A3: J3.4 J4.4 J5.4 J6.4 U6.A77 | length 162.8
  Top Layer (*.GTL) w0.254: J3.4@35.099,7.548 35.099,9.58 34.21,10.469 34.21,11.726 35.099,12.615 J4.4@35.099,33.248 35.099,35.342 34.21,36.231 34.21,37.426 35.099,38.315 J5.4@35.099,58.947 35.099,61.388 34.21,62.277 34.21,63.126 35.099,64.015 35.099,69.173 34.432,69.841 v1(34.432,75.924) 34.432,78.822 35.099,79.489 J6.4@35.099,84.647 ; v1(87.365,78.045) 87.365,84.018 90.423,87.075 98.289,87.075 104.786,80.578 U6.A77@106.581,80.578
  Bottom Layer (*GBL) w0.254: v1(34.432,75.924) 36.553,78.045 v1(87.365,78.045)
A4: J3.5 J4.5 J5.5 J6.5 U6.A79 | length 162.7
  Top Layer (*.GTL) w0.254: J3.5@36.369,5.643 36.369,8.195 35.48,9.084 35.48,9.821 36.369,10.71 J4.5@36.369,31.343 36.369,33.895 35.48,34.784 35.48,35.521 36.369,36.41 J5.5@36.369,57.042 36.369,59.595 35.48,60.484 35.48,61.221 36.369,62.11 36.369,67.268 35.626,68.012 v1(35.626,75.035) 35.626,76.841 36.369,77.584 J6.5@36.369,82.742 ; v1(86.629,77.004) 86.629,83.82 90.265,87.456 98.447,87.456 104.825,81.078 U6.A79@106.581,81.078
  Bottom Layer (*GBL) w0.254: v1(35.626,75.035) 37.594,77.004 v1(86.629,77.004)
A5: J3.6 J4.6 J5.6 J6.6 U6.A81 | length 161.7
  Top Layer (*.GTL) w0.254: J3.6@37.639,7.548 37.639,9.522 36.75,10.411 36.75,29.907 37.639,30.796 J4.6@37.639,33.248 37.639,35.604 36.75,36.493 36.75,37.469 36.794,37.513 36.794,55.706 37.404,56.316 37.404,58.712 J5.6@37.639,58.947 37.639,61.5 36.75,62.389 36.75,63.616 36.87,63.736 v1(36.87,74.223) 36.87,80.776 37.505,81.411 37.505,84.513 J6.6@37.639,84.647 ; v1@85.892,75.975 85.892,83.622 90.107,87.837 98.605,87.837 104.864,81.578 U6.A81@106.581,81.578
  Bottom Layer (*GBL) w0.254: v1(36.87,74.223) 38.623,75.975 v1(85.867,75.975)
CR_I2C_SCL: U1.6 U3.6 | length 16.6
  Top Layer (*.GTL) w0.254: U3.6@177.506,49.657 179.172,49.657 180.442,50.927 v1(180.442,57.658) ; U1.6@185.237,56.19 185.268,56.221 v1(185.268,57.76)
  Bottom Layer (*GBL) w0.254: v1(180.442,57.658) 180.543,57.76 v1(185.268,57.76)
CR_I2C_SDA: U1.3 U3.5 | length 9.8
  Top Layer (*.GTL) w0.254: U3.5@177.506,48.387 179.197,48.387 v1(179.222,48.412) ; v1(185.237,48.438) U1.3@185.237,50.49
  Bottom Layer (*GBL) w0.254: v1(179.222,48.412) 179.248,48.438 v1(185.237,48.438)
CR_SILICON_SN: P1.6 U2.1 | length 17.2
  Top Layer (*.GTL) w0.254: U2.1@193.802,53.848 193.827,53.823 v1(193.827,51.257)
  Bottom Layer (*GBL) w0.254: v1(193.827,51.257) 193.904,51.181 206.689,51.181 P1.6@207.87,50
D: C1.2 C2.2 C3.1 C4.1 C5.1 C6.1 C7.2 C10.NEG C11.NEG C14.1 C16.NEG C17.NEG D1.1 J1.4 J1.5 J1.6 J2.10 J2.11 J2.13 J2.14 J3.7 J3.8 J3.24 J4.8 J4.24 J5.7 J5.24 J6.24 P1.5 P1.12 P1.16 PS1.2 R1.1 R3.1 R7.2 S1.1 U1.4 U2.3 U3.1 U3.2 U3.3 U3.4 U4.1 U4.7 U6.A121 U6.A122 U6.B122 | length 118.5
  Top Layer (*.GTL) w0.254: U6.A121@109.671,55.383 U6.A121@109.671,60.653 U6.A121@109.671,67.003 U6.A121@109.671,72.273 ; U6.A122@109.671,92.273 U6.A122@109.671,87.003 ; v1(110.82,87.003) U6.A122@109.671,87.003 ; v1(111.227,72.273) U6.A121@109.671,72.273 ; v1(129.667,94.894) 129.741,94.821 U6.B122@129.741,92.273 U6.B122@129.741,87.003 U6.B122@129.741,80.653 U6.B122@129.741,75.383 ; R3.1@159.07,51.032 161.319,51.032 v1(161.341,51.054) ; U3.4@172.506,48.387 173.685,48.387 173.99,48.692 173.99,52.883 173.279,53.594 v1(173.279,54.534) 173.256,54.557 S1.1@173.256,56.997 ; U3.3@172.506,49.657 173.863,49.657 ; U3.2@172.506,50.927 173.914,50.927 ; U3.1@172.506,52.197 173.965,52.197 ; C1.2@182.101,53.848 183.388,53.848 v1(183.413,53.823) ; U1.4@185.887,50.49 185.887,51.419 v1(186.563,52.095) ; U2.3@191.618,54.788 191.618,56.185 v1(191.643,56.21) ; U6.A121@109.671,72.273 U6.A122@109.671,75.383 U6.A122@109.671,80.653 U6.A122@109.671,87.003
  Top Layer (*.GTL) w1.27: C17.NEG@147.005,48.365 147.005,44.994 v2(147.019,45.009) ; C16.NEG@158.181,62.446 161.43,62.446 v2(161.442,62.459)
  Bottom Layer (*GBL) w0.127: R1.1@177.256,80.446 177.256,82.362 v1(177.317,82.423)
  Bottom Layer (*GBL) w0.254: v1(149.621,80.242) 149.664,80.285 D1.1@149.664,81.448 ; v1(173.279,54.534) 173.33,54.483 C2.2@175.006,54.483
  Bottom Layer (*GBL) w1.27: v2(163.627,86.004) 163.642,85.99 C6.1@163.642,84.052 C5.1@163.642,82.274 C4.1@163.642,80.446 C3.1@163.642,78.718 ; C14.1@178.221,12.043 178.221,15.955 C10.NEG@178.399,16.133 180.937,16.133 PS1.2@182.101,17.296 182.985,16.412 C11.NEG@187.822,16.412 ; R7.2@198.45,62.687 202.142,62.687 P1.16@202.79,63.335
DIN: J3.12 J4.12 J5.12 J6.12 U6.A89 | length 159.5
  Top Layer (*.GTL) w0.254: v1(82.946,68.165) 82.946,82.831 89.476,89.361 99.236,89.361 105.019,83.578 U6.A89@106.581,83.578
  MidLayer1 (*G1) w0.254: J3.12@45.259,7.548 45.259,10.1 44.37,10.989 44.37,11.726 45.259,12.615 J4.12@45.259,33.248 45.259,35.8 44.37,36.689 44.37,37.426 45.259,38.315 J5.12@45.259,58.947 45.259,61.16 46.344,62.245 v1(46.344,68.076) 46.344,83.562 J6.12@45.259,84.647
  Bottom Layer (*GBL) w0.254: v1(46.344,68.076) 46.433,68.165 v1(82.946,68.165)
DOUT: J3.18 J4.18 J5.18 J6.18 U6.A91 | length 161.8
  Top Layer (*.GTL) w0.254: v1@82.209,74.985 82.209,82.633 89.318,89.742 99.394,89.742 105.058,84.078 U6.A91@106.581,84.078
  MidLayer1 (*G1) w0.254: J3.18@37.639,11.358 37.639,31.99 36.75,32.879 36.75,33.616 37.639,34.505 J4.18@37.639,37.058 37.639,57.69 36.75,58.579 36.75,59.316 37.639,60.205 J5.18@37.639,62.757 37.639,67.916 37.988,68.264 v1(37.988,73.359) 37.988,77.884 37.639,78.232 37.639,83.39 36.75,84.279 36.75,85.016 37.639,85.905 J6.18@37.639,88.457
  Bottom Layer (*GBL) w0.254: v1(37.988,73.359) 39.613,74.985 v1(82.235,74.985)
ETHERGND: J2.8 U6.B69 | length 164.2
  Top Layer (*.GTL) w0.254: J2.8@17.64,21.255 19.056,21.255 23.688,25.886 v1(25.669,25.886) ; v1(117.516,23.269) 117.575,23.328 119.047,23.328 122.967,27.249 122.967,77.097 124.448,78.578 U6.B69@126.651,78.578
  Bottom Layer (*GBL) w0.254: v1(25.669,25.886) 27.862,25.886 30.538,23.21 117.457,23.21 v1(117.516,23.269)
ETHERLED_ACT: R5.1 U6.A103 | length 185.6
  Top Layer (*.GTL) w0.254: R5.1@2.961,14.836 2.961,16.209 2.286,16.884 2.286,32.442 4.485,34.641 4.485,88.396 v1(11.648,95.559) ; v1(101.158,94.517) 101.166,94.509 101.166,90.897 104.984,87.078 U6.A103@106.581,87.078
  Bottom Layer (*GBL) w0.254: v1(11.648,95.559) 11.877,95.787 99.888,95.787 v1(101.158,94.517)
ETHERLED_FD: R4.1 U6.A105 | length 164
  Top Layer (*.GTL) w0.254: R4.1@3.291,36.665 3.291,37.799 4.104,38.612 4.104,88.913 v1(11.199,96.008) ; v1(101.607,94.966) 101.666,94.907 101.666,90.936 105.023,87.578 U6.A105@106.581,87.578
  Bottom Layer (*GBL) w0.254: v1(11.199,96.008) 11.36,96.168 100.405,96.168 v1(101.607,94.966)
ETHERRX+: J2.3 U6.B67 | length 165.8
  Top Layer (*.GTL) w0.152: U6.B67@126.62,78.109 U6.B67@126.651,78.078
  Top Layer (*.GTL) w0.254: v1(117.965,22.82) 118.024,22.879 119.305,22.879 123.467,27.041 123.467,77.058 124.487,78.078 U6.B67@126.651,78.078
  Bottom Layer (*GBL) w0.254: J2.3@15.1,27.605 21.588,27.605 23.942,25.251 v1(25.669,25.251) 27.959,25.251 30.449,22.761 117.906,22.761 v1(117.965,22.82)
ETHERRX-: J2.6 U6.B65 | length 162.6
  Top Layer (*.GTL) w0.254: v1(118.414,22.371) 119.504,22.371 123.967,26.834 123.967,77.02 124.526,77.578 U6.B65@126.651,77.578
  Bottom Layer (*GBL) w0.254: J2.6@17.64,23.795 18.461,24.616 v1(25.669,24.616) 28.055,24.616 30.359,22.312 118.355,22.312 v1(118.414,22.371)
ETHERTX+: J2.1 U6.A70 | length 162.8
  Top Layer (*.GTL) w0.254: J2.1@15.1,30.145 21.962,30.145 25.585,26.521 v1(25.669,26.521) ; U6.A70@112.761,78.578 113.617,78.578 118.303,73.893 118.303,24.954 v1(117.067,23.718)
  Bottom Layer (*GBL) w0.254: v1(25.669,26.521) 27.766,26.521 30.628,23.659 117.008,23.659 v1(117.067,23.718)
ETHERTX-: J2.2 U6.A68 | length 158
  Top Layer (*.GTL) w0.254: U6.A68@112.761,78.078 113.578,78.078 117.922,73.735 117.922,25.471 v1(116.618,24.167)
  Bottom Layer (*GBL) w0.254: J2.2@17.64,28.875 21.537,28.875 23.256,27.156 v1(25.669,27.156) 27.67,27.156 30.718,24.108 116.559,24.108 v1(116.618,24.167)
I2C_SCL: J3.22 J4.22 J5.22 J6.22 U6.A111 | length 154.6
  Top Layer (*.GTL) w0.254: v1(42.661,94.746) 42.661,88.515 J6.22@42.719,88.457 ; v1(103.012,94.289) 102.986,94.263 102.986,91.088 104.996,89.078 U6.A111@106.581,89.078
  MidLayer1 (*G1) w0.254: J3.22@42.719,11.358 42.719,31.99 41.83,32.879 41.83,33.616 42.719,34.505 J4.22@42.719,37.058 42.237,37.54 42.237,55.427 42.338,55.528 42.338,58.071 41.83,58.579 41.83,59.955 42.719,60.844 J5.22@42.719,62.757 42.719,64.418 42.719,68.863 43.246,69.389 43.246,70.108 42.719,70.634 42.719,83.39 41.83,84.279 41.83,85.536 42.719,86.425 J6.22@42.719,88.457
  Bottom Layer (*GBL) w0.254: v1(42.661,94.746) 42.763,94.847 86.222,94.847 86.984,94.085 100.871,94.085 100.947,94.009 101.368,94.009 101.647,94.289 v1(103.012,94.289)
I2C_SDA: J3.21 J4.21 J5.21 J6.21 U6.A109 | length 155.4
  Top Layer (*.GTL) w0.254: J6.21@41.449,86.552 41.671,86.774 v1(41.671,93.603) ; v1(102.224,93.603) 102.224,91.139 104.785,88.578 U6.A109@106.581,88.578
  MidLayer1 (*G1) w0.254: J3.21@41.449,9.453 41.449,30.085 40.56,30.974 40.56,31.711 41.449,32.6 J4.21@41.449,35.153 41.449,55.427 40.56,56.316 40.56,57.931 41.315,58.686 41.315,60.718 J5.21@41.449,60.852 41.449,63.107 40.807,63.75 40.807,65.51 40.807,66.975 41.449,67.617 41.449,69.872 42.338,70.761 42.338,83.111 41.449,84 J6.21@41.449,86.552
  Bottom Layer (*GBL) w0.254: v1(41.671,93.603) v1(102.224,93.603)
NetC8_neg: C8.NEG C9.NEG C12.POS C13.POS C14.2 C15.2 PS1.5 | length 64.3
  Bottom Layer (*GBL) w1.27: C9.NEG@150.662,24.032 150.662,15.726 C13.POS@150.815,15.574 155.077,19.836 PS1.5@161.781,19.836 ; C15.2@165.394,19.816 PS1.5@161.801,19.816 ; C8.NEG@174.233,30.052 169.611,25.429 163.616,25.429 161.781,23.594 PS1.5@161.781,19.836 ; C14.2@178.221,9.757 178.17,9.808 C12.POS@172.303,9.808 168.747,13.364 168.253,13.364 PS1.5@161.801,19.816 ; PS1.5@161.781,19.836 PS1.5@161.801,19.816
NetC8_pos: C8.POS FB1.1 PS1.4 | length 10.3
  Bottom Layer (*GBL) w1.27: FB1.1@158.155,29.9 158.252,29.996 PS1.4@161.781,29.996 161.836,30.052 C8.POS@168.391,30.052
NetC11_pos: C11.POS L1.2 PS1.3 | length 9.9
  Bottom Layer (*GBL) w1.27: L1.2@178.094,22.407 178.124,22.376 PS1.3@182.101,22.376 182.537,22.813 C11.POS@187.822,22.813
NetC12_neg: C12.NEG FB2.1 PS1.6 | length 8.2
  Bottom Layer (*GBL) w1.27: FB2.1@158.358,9.656 161.76,9.656 PS1.6@161.781,9.676 161.912,9.808 C12.NEG@166.461,9.808
NetF1_1: F1.1 P1.13 P1.14
NetJ2_9: J2.9 R4.2 | length 5.4
  Top Layer (*.GTL) w0.254: J2.9@3.848,32.025 5.577,33.754 R4.2@5.577,36.665
NetJ2_12: J2.12 R5.2 | length 4.6
  Top Layer (*.GTL) w0.254: R5.2@5.323,14.836 5.323,19.327 J2.12@5.372,19.375
NetP1_2: P1.2 U1.2 | length 30.8
  Top Layer (*.GTL) w0.254: v1(184.556,44.425) 184.587,44.455 U1.2@184.587,50.49
  Bottom Layer (*GBL) w0.254: v1(184.556,44.425) 184.714,44.267 200.731,44.267 202.133,45.669 206.079,45.669 P1.2@207.87,47.46
NetP1_3: P1.3 U1.5 | length 26.5
  Top Layer (*.GTL) w0.254: U1.5@185.887,56.19 186.177,56.19 188.036,54.331 v1(188.036,48.489)
  Bottom Layer (*GBL) w0.254: v1(188.036,48.489) 188.087,48.539 204.251,48.539 P1.3@205.33,47.46
NetQ1_3: Q1.3 U2.2 | length 1.7
  Top Layer (*.GTL) w0.254: U2.2@193.802,55.728 193.904,55.626 Q1.3@195.504,55.626
NetR1_2: R1.2 U4.4 | length 3.9
  Bottom Layer (*GBL) w0.127: U4.4@177.231,74.286 177.231,78.134 R1.2@177.256,78.16
NetR2_1: R2.1 R3.2 U5.1 | length 7
  Top Layer (*.GTL) w0.254: U5.1@153.101,51.54 154.631,51.54 155.139,51.032 R3.2@156.784,51.032 157.038,51.032 R2.1@159.07,53.064
NetRN1_2: RN1.2 U6.B57 | length 4
  Top Layer (*.GTL) w0.254: U6.B57@126.651,70.578 128.044,70.578 v1(128.056,70.59)
  Bottom Layer (*GBL) w0.254: RN1.2@127.599,72.965 127.599,71.835 128.056,71.378 v1(128.056,70.59)